# Altium PCB 自己修改盲文板.PcbDoc (part 2 of 4)
Units mm, origin at the board's own origin, x right, y up, seen from the top; angles counter-clockwise.
Board outline 152.4 x 101.6 mm, 4 copper layers (Top Layer, VCC, GND, Bottom Layer); 193 components, 524 nets, 1381 pads, 518 vias.
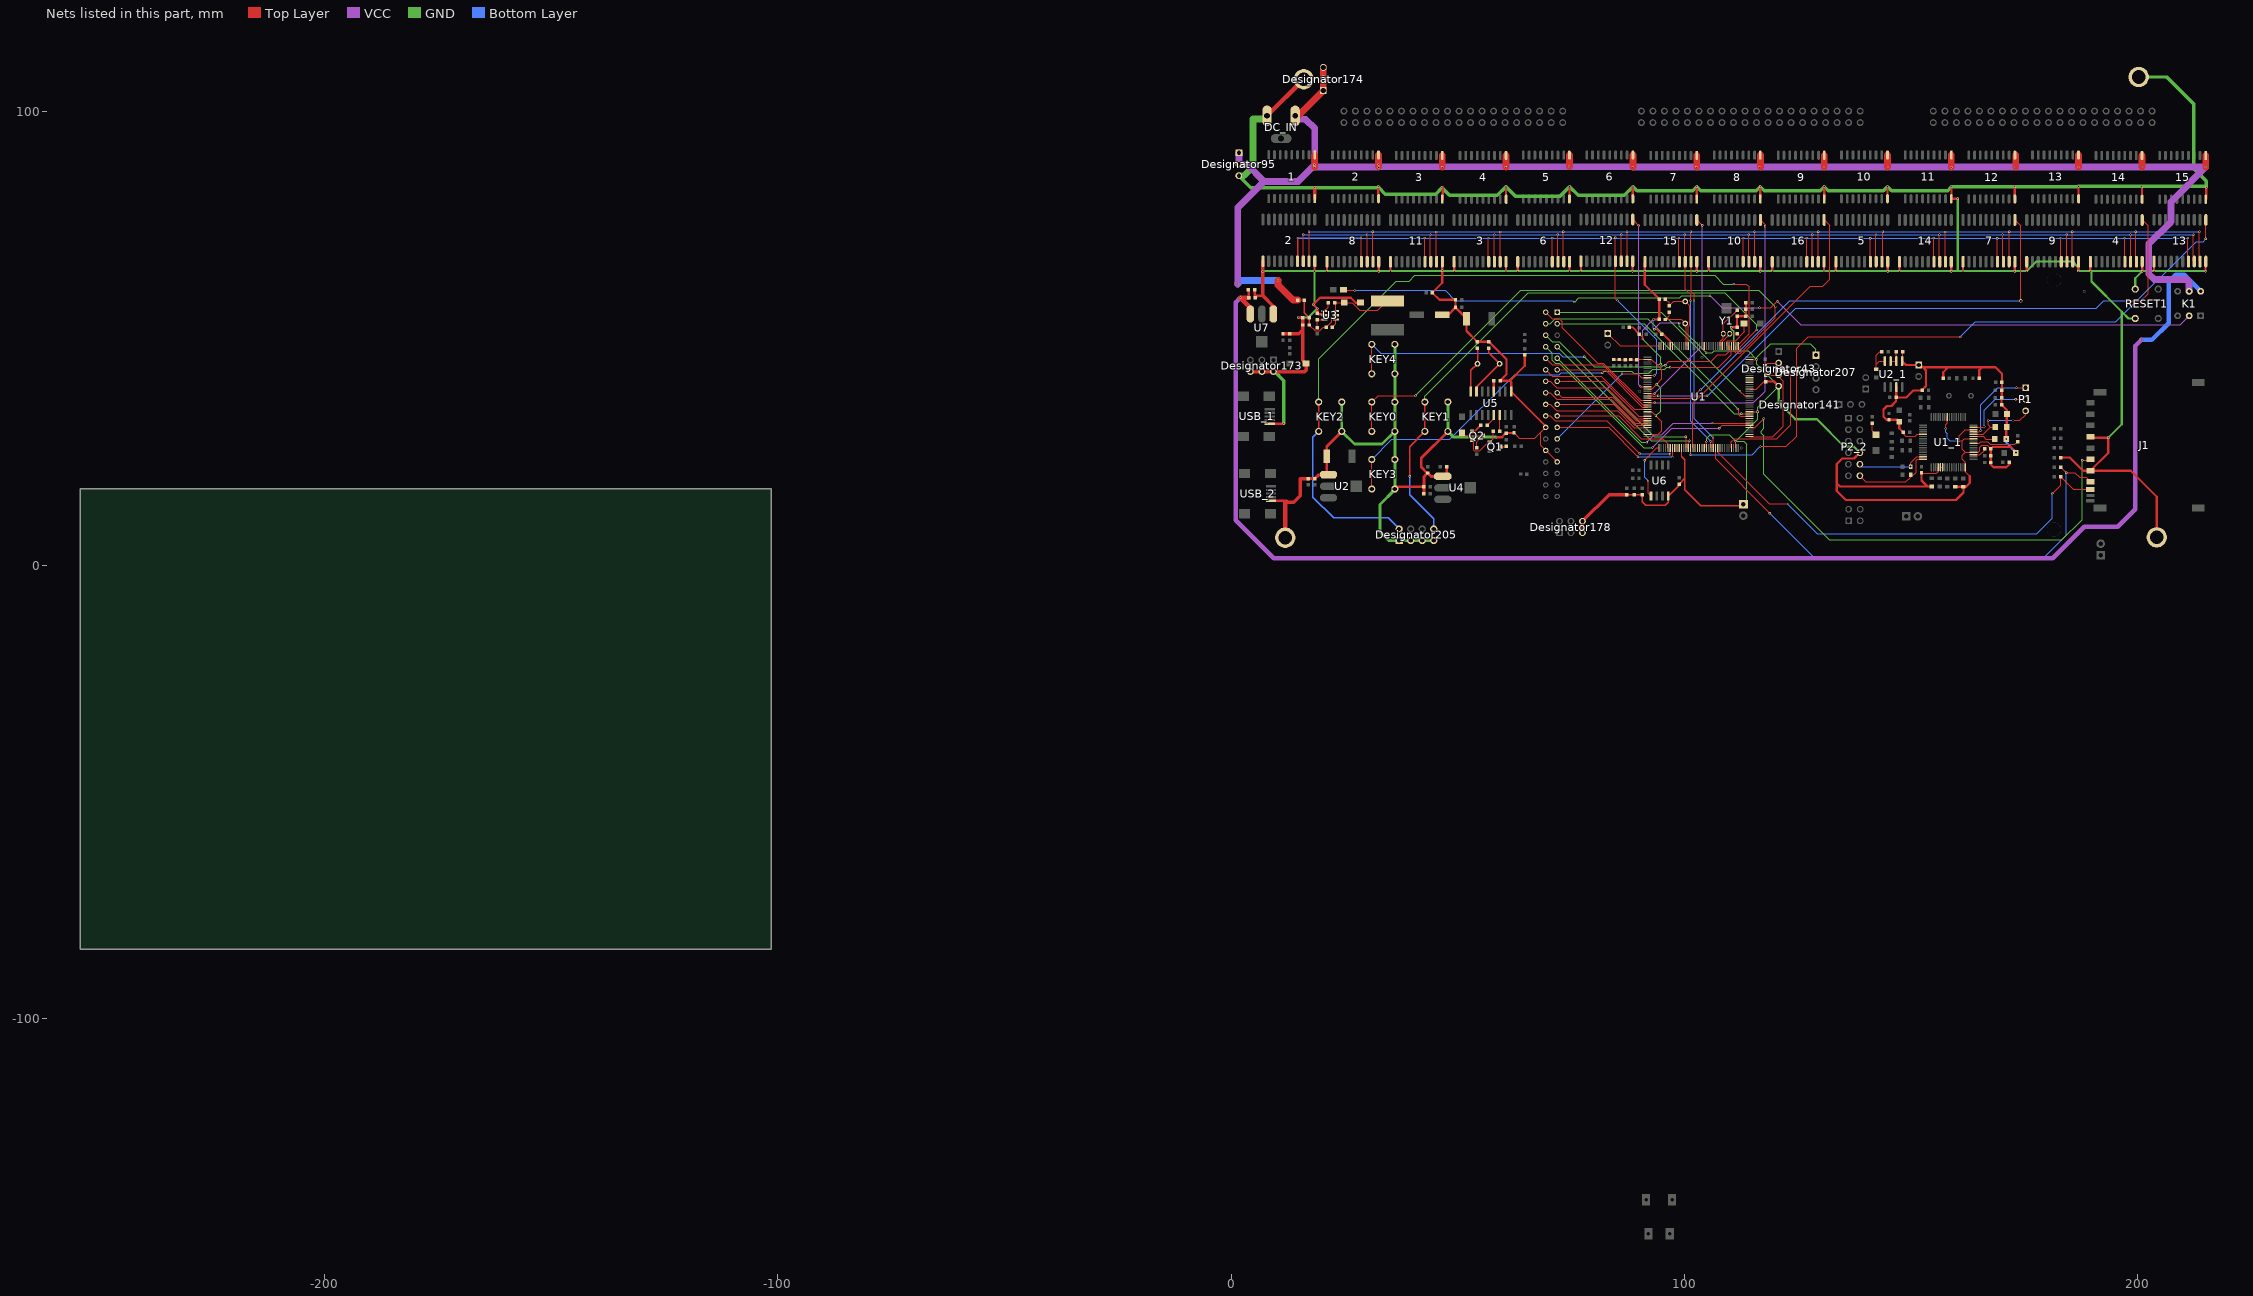
[diagram p4: the nets of this part, all layers, seen from the top]

## Via types
v1: diameter 0.5, hole 0.3, Top Layer to Bottom Layer, 463 vias
v2: diameter 0.5, hole 0.4, Top Layer to Bottom Layer, 48 vias
v3: diameter 1.27, hole 1.016, Top Layer to Bottom Layer, 2 vias
v4: diameter 1, hole 1, Top Layer to Bottom Layer, 2 vias
v5: diameter 3, hole 3, Top Layer to Bottom Layer, tented both sides, 2 vias
v6: diameter 0.8, hole 0.5, Top Layer to Bottom Layer, 1 vias

## Nets (pads, with @x,y where several pads share a name; then routed paths per layer and width w, separated by ;. In a path a pad name is that pad's centre, name@x,y a point inside that pad or via, vN(x,y) a via of type N, cw(c..) or ccw(c..) an arc to the next point about the centre after c; other vN are vias at no path point) (continued)
D6: 2.7@14.63,67.003 3.7@56.794,66.901 4.7@197.111,66.901 5.7@140.984,66.901 6.7@70.826,66.901 7.7@169.047,66.901 8.7@28.73,66.901 9.7@183.079,66.901 10.7@112.921,66.901 11.7@42.762,66.901 12.7@84.76,67.003 13.7@211.15,66.926 14.7@155.016,66.901 15.7@98.889,66.901 16.7 U1.45 | length 304.8
  Top Layer w0.2: 8.7@28.654,66.901 v1@28.654,72.187 ; 11.7@42.672,66.991 v1(42.672,72.111) ; 3.7@56.744,66.951 v1(56.744,72.111) ; 6.7@70.79,66.937 v1(70.79,72.111) ; 12.7@84.684,67.079 v1(84.684,72.161) ; 12.7@84.76,67.003 84.76,58.776 85.192,58.344 v1(85.192,58.318) ; U1.45@91.823,41.812 v1@93.266,41.812 ; 15.7@98.755,67.035 v1(98.755,72.111) ; 10.7@112.921,66.901 112.979,66.959 v1(112.979,72.111) ; v1(126.949,72.111) 126.949,66.904 16.7@126.952,66.901 ; v1(140.97,72.085) 140.97,66.915 5.7@140.984,66.901 ; v1(154.965,72.136) 154.965,66.951 14.7@155.016,66.901 ; v1(168.935,72.085) 168.935,67.013 7.7@169.047,66.901 ; v1(182.931,72.136) 182.931,67.049 9.7@183.079,66.901 ; v1(197.028,72.111) 197.028,66.984 4.7@197.111,66.901 ; 13.7@211.023,67.053 v1(211.023,72.111)
  Top Layer w0.3: 2.7@14.63,67.003 v1@14.63,72.085
  Bottom Layer w0.2: v1@28.626,72.111 v1(42.672,72.111) v1(56.744,72.111) v1(70.79,72.111) 84.633,72.111 v1(84.684,72.161) ; v1@84.684,72.111 v1(98.755,72.111) v1(112.979,72.111) v1(126.949,72.111) 140.945,72.111 v1(140.97,72.085) ; v1(85.192,58.318) 85.192,58.344 93.819,49.717 93.819,42.308 v1(93.294,41.783) ; v1@140.97,72.111 v1(197.028,72.111) v1(211.023,72.111)
  Bottom Layer w0.3: v1(14.605,72.111) v1@28.55,72.111
  other v1: 28.626,72.187
D7: 2.8@15.9,67.003 3.8@58.064,66.901 4.8@198.381,66.901 5.8@142.254,66.901 6.8@72.096,66.901 7.8@170.317,66.901 8.8@30,66.901 9.8@184.349,66.901 10.8@114.191,66.901 11.8@44.032,66.901 12.8@86.03,67.003 13.8@212.42,66.926 14.8@156.286,66.901 15.8@100.159,66.901 16.8 U1.96 | length 328.7
  Top Layer w0.2: 2.8@15.9,67.003 v1(15.9,72.873) ; 8.8@30,66.901 v1@30,72.844 ; 11.8@43.942,66.991 v1(43.942,72.873) ; 3.8@58.064,66.901 v1(58.064,72.873) ; 6.8@72.034,66.962 v1(72.034,72.873) ; 12.8@86.004,67.028 v1(86.004,72.873) ; 15.8@100.051,67.009 v1(100.051,72.873) ; 15.8@100.159,66.901 100.159,60.852 101.321,59.69 v1(101.321,58.268) ; v1(105.791,27.254) 105.791,25.844 U1.96@105.823,25.812 ; v1(114.148,72.873) 114.148,66.944 10.8@114.191,66.901 ; v1(128.168,72.873) 128.168,66.955 16.8@128.222,66.901 ; v1(142.215,72.873) 142.215,66.94 5.8@142.254,66.901 ; v1(156.21,72.847) 156.21,66.976 14.8@156.286,66.901 ; v1(170.129,72.873) 170.129,67.089 7.8@170.317,66.901 ; v1(184.277,72.873) 184.277,66.973 9.8@184.349,66.901 ; 4.8@198.381,66.901 v1@198.381,72.815 ; 13.8@212.217,67.13 v1(212.217,72.847)
  Bottom Layer w0.2: v1(15.9,72.873) v1(29.972,72.873) ; v1@29.972,72.847 v1(156.21,72.847) 170.104,72.847 v1(170.129,72.873) ; v1(101.321,58.268) 101.321,31.725 v1(105.791,27.254) ; v1@170.129,72.847 v1(198.349,72.847) v1(212.217,72.847) v1@212.242,72.847
D8: 2.9@17.17,67.003 3.9@59.334,66.901 4.9@199.651,66.901 5.9@143.524,66.901 6.9@73.366,66.901 7.9@171.587,66.901 8.9@31.27,66.901 9.9@185.619,66.901 10.9@115.461,66.901 11.9@45.302,66.901 12.9@87.3,67.003 13.9@213.69,66.926 14.9@157.556,66.901 15.9@101.429,66.901 16.9 U1.97 | length 338
  Top Layer w0.2: 2.9@17.17,67.003 v1(17.17,73.482) ; 8.9@31.27,66.901 v1@31.27,73.454 ; 11.9@45.237,66.966 v1(45.237,73.457) ; 3.9@59.334,66.901 v1(59.334,73.457) ; 6.9@73.254,67.013 v1(73.254,73.482) ; 12.9@87.3,67.003 v1(87.3,73.482) ; v1(101.397,73.482) 101.397,66.933 15.9@101.429,66.901 101.429,60.318 102.083,59.665 v1(102.083,58.318) ; v1(106.274,28.118) 106.341,28.05 106.341,25.83 U1.97@106.323,25.812 ; v1(115.443,73.482) 115.443,66.918 10.9@115.461,66.901 ; v1(129.464,73.482) 129.464,66.929 16.9@129.492,66.901 ; 5.9@143.524,66.901 143.739,67.115 v1(143.739,73.482) ; v1(157.505,73.431) 157.505,66.951 14.9@157.556,66.901 ; 7.9@171.587,66.901 171.602,66.916 v1(171.602,73.482) ; v1(185.471,73.482) 185.471,67.049 9.9@185.619,66.901 ; v1(199.492,73.482) 199.492,67.06 4.9@199.651,66.901 ; v1(213.563,73.508) 213.563,67.053 13.9@213.69,66.926
  Bottom Layer w0.2: v1(17.17,73.482) v1(31.242,73.482) v1@45.212,73.482 ; v1@45.237,73.482 v1(73.254,73.482) v1(87.3,73.482) v1(101.397,73.482) v1(115.443,73.482) v1(129.464,73.482) v1(143.739,73.482) v1(171.602,73.482) v1(185.471,73.482) v1(199.492,73.482) 213.538,73.482 v1(213.563,73.508) ; v1(102.083,58.318) 102.083,32.309 v1(106.274,28.118)
DIN1-3: C48.1 C49.1 K1.6 U7.3 | length 327.7
  Top Layer w0.5: C49.1@3.802,60.706 3.886,60.622 C48.1@3.886,58.928
  Top Layer w1: C48.1@3.886,58.928 v1(2.032,58.928) 4.233,56.727 U7.3@4.233,55.374
  VCC w1: v1(2.032,58.928) 1.016,57.912 1.016,9.906 9.398,1.524 181.204,1.524 188.112,8.433 195.504,8.433 199.365,12.294 199.365,48.311 v1(200.685,49.632)
  Bottom Layer w1: v1(200.685,49.632) 203.048,49.632 206.756,53.34 206.756,62.484 208.28,64.008 210.175,64.008 K1.6@213.817,60.366
"F CS": U1.73 U6.1 | length 12.8
  Top Layer w0.2: v1(91.186,23.114) 93.884,25.812 U1.73@94.323,25.812 ; v1(91.948,18.542) 91.948,15.824 U6.1@92.583,15.189
  Bottom Layer w0.2: v1(91.186,23.114) 91.186,19.304 v1(91.948,18.542)
"FIFO OE": 
"FIFO RCLK": U1.134
"FIFO RRST": 
"FIFO WEN": U1.133
"FIFO WRST": 
"FSMC A6": 12.11@88.57,76.203 U1.50 | length 39.1
  Top Layer w0.254: 12.11@88.57,76.203 v1(89.916,74.856) ; v1(90.297,39.345) 90.33,39.312 U1.50@91.823,39.312
  VCC w0.254: v1(89.916,74.856) 89.916,39.726 v1(90.297,39.345)
"FSMC A7": 15.11@102.699,76.101 U1.53 | length 44.7
  Top Layer w0.2: U1.53@91.823,37.812 93.329,37.812 v1(93.345,37.795)
  Top Layer w0.254: 15.11@102.699,76.101 102.699,76.092 v1(103.886,74.905)
  VCC w0.254: v1(93.345,37.795) 103.886,48.336 v1@103.886,74.93
"FSMC A8": 4.11@200.921,76.101 U1.54 | length 136.6
  Top Layer w0.2: U1.54@91.823,37.312 91.849,37.338 93.024,37.338 93.117,37.245 93.573,37.245 93.666,37.338 v1(94.158,37.338) ; v1(197.358,58.318) 200.66,58.318 202.209,59.868 202.209,74.812 4.11@200.921,76.101
  VCC w0.254: v1(94.158,37.338) 94.201,37.382 104.884,37.382 v1(104.953,37.313)
  Bottom Layer w0.254: v1(104.953,37.313) 105.159,37.313 124.463,56.617 190.779,56.617 192.481,58.318 v1(197.358,58.318)
"FSMC A9": 7.11@172.857,76.101 U1.55 | length 109.6
  Top Layer w0.2: U1.55@91.823,36.812 93.338,36.812 93.362,36.788 101.66,36.788 v1(103.505,38.633) ; 7.11@172.857,76.101 174.126,74.832 v6(174.126,58.251)
  Bottom Layer w0.2: v1@103.48,38.557 123.173,58.251 v6(174.126,58.251)
"FSMC A10": Designator141.2 U1.56 | length 31.3
  Top Layer w0.2: Designator141.2@69.367,55.753 70.82,54.3 72.358,54.3 72.995,53.663 72.995,52.373 80.827,44.54 82.098,44.54 90.327,36.312 U1.56@91.823,36.312
"FSMC A11": 10.11@116.731,76.101 U1.57 | length 65.2
  Top Layer w0.2: U1.57@91.823,35.812 v1@93.368,35.812
  Top Layer w0.254: 10.11@116.731,76.101 117.754,75.077 v1(117.754,74.727)
  VCC w0.254: v1(93.421,35.865) 93.541,35.745 115.163,35.745 117.754,38.336 v1(117.754,74.727)
"FSMC A12": 13.11@214.96,76.126 U1.87 | length 150.3
  Top Layer w0.2: v1@101.323,24.335 U1.87@101.323,25.812 ; v1(116.725,26.142) 122.408,26.142 124.714,28.448 124.714,47.752 127.254,50.292 v1(160.782,50.292) ; v1(214.96,71.933) 13.11@214.96,76.126
  Bottom Layer w0.2: v1(101.321,24.333) 114.917,24.333 v1(116.725,26.142) ; v1(160.782,50.292) 164.109,53.619 195.097,53.619 212.801,71.323 214.351,71.323 v1(214.96,71.933)
"FSMC A13": 16.11 U1.88 | length 64.9
  Top Layer w0.254: U1.88@101.823,25.812 101.823,35.613 127.678,61.468 130.477,61.468 131.978,62.97 131.978,74.885 16.11@130.762,76.101
"FSMC A14": U1.89
"FSMC A15": U1.90
"FSMC A16": U1.80
"FSMC A17": U1.81
"FSMC A18": U1.82
"FSMC D0": Designator141.6 U1.85 | length 42.7
  Top Layer w0.254: v1(100.279,28.27) 100.33,28.219 U1.85@100.33,25.819
  GND w0.254: Designator141.6@69.367,50.673 70.793,49.247 72.369,49.247 93.346,28.27 v1(100.279,28.27)
"FSMC D1": Designator141.7 U1.86 | length 39.5
  Top Layer w0.254: U1.86@100.823,25.812 100.823,26.801 101.067,27.045 v1(101.067,27.432)
  GND w0.254: Designator141.7@71.907,48.133 92.608,27.432 v1(101.067,27.432)
"FSMC D2": Designator141.8 U1.114 | length 57.1
  Top Layer w0.2: v1(107.62,30.15) 108.282,30.812 U1.114@114.323,30.812
  VCC w0.254: v1(92.913,25.908) 97.155,30.15 v1(107.62,30.15)
  GND w0.254: Designator141.8@69.367,48.133 70.793,46.707 70.793,45.131 71.446,44.479 72.38,44.479 90.95,25.908 v1(92.913,25.908)
"FSMC D3": Designator141.9 U1.115 | length 51.8
  Top Layer w0.2: v1(106.179,31.312) U1.115@114.323,31.312
  VCC w0.254: v1(91.694,27.102) 93.327,28.735 94.963,28.735 97.54,31.312 v1(106.179,31.312)
  GND w0.254: Designator141.9@71.907,45.593 90.399,27.102 v1(91.694,27.102)
"FSMC D4": Designator141.10 U1.58 | length 26.7
  Top Layer w0.2: Designator141.10@69.367,45.593 70.82,44.14 81.933,44.14 90.762,35.312 U1.58@91.823,35.312
"FSMC D5": Designator141.11 U1.59 | length 23.3
  Top Layer w0.2: Designator141.11@71.907,43.053 82.454,43.053 90.696,34.812 U1.59@91.823,34.812
"FSMC D6": Designator141.12 U1.60 | length 26.1
  Top Layer w0.2: Designator141.12@69.367,43.053 70.82,41.6 81.596,41.6 88.885,34.312 U1.60@91.823,34.312
"FSMC D7": Designator141.13 U1.63 | length 23.1
  Top Layer w0.2: Designator141.13@71.907,40.513 82.118,40.513 89.847,32.785 91.796,32.785 U1.63@91.823,32.812
"FSMC D8": Designator141.14 U1.64 | length 25.9
  Top Layer w0.2: Designator141.14@69.367,40.513 70.37,40.513 71.822,39.06 82.86,39.06 89.608,32.312 U1.64@91.823,32.312
"FSMC D9": Designator141.15 U1.65 | length 22.5
  Top Layer w0.2: Designator141.15@71.907,37.973 72.873,37.008 84.125,37.008 89.321,31.812 U1.65@91.823,31.812
"FSMC D10": Designator141.16 U1.66 | length 25.2
  Top Layer w0.2: Designator141.16@69.367,37.973 70.37,37.973 71.822,36.52 83.857,36.52 89.066,31.312 U1.66@91.823,31.312
"FSMC D11": Designator141.17 U1.67 | length 21.8
  Top Layer w0.2: Designator141.17@71.907,35.433 84.379,35.433 89,30.812 U1.67@91.823,30.812
"FSMC D12": Designator141.18 U1.68 | length 24.6
  Top Layer w0.2: Designator141.18@69.367,35.433 70.37,35.433 71.822,33.98 85.266,33.98 88.934,30.312 U1.68@91.823,30.312
"FSMC D13": Designator141.19 U1.77 | length 27.9
  Top Layer w0.2: Designator141.19@71.907,32.893 85.471,32.893 90.479,27.885 95.201,27.885 96.323,26.763 U1.77@96.323,25.812
"FSMC D14": Designator141.20 U1.78 | length 32.4
  Top Layer w0.2: Designator141.20@69.367,32.893 70.37,32.893 71.457,31.806 82.875,31.806 v1(90.106,24.575) ; v1(96.799,24.409) 96.823,24.433 U1.78@96.823,25.812
  Bottom Layer w0.2: v1(90.106,24.575) 96.634,24.575 v1(96.799,24.409)
"FSMC D15": Designator141.21 U1.79 | length 30.2
  Top Layer w0.2: Designator141.21@71.907,30.353 83.261,30.353 v1(89.713,23.901) ; U1.79@97.323,25.812 97.349,25.785 97.349,23.816 v1(97.333,23.8)
  Bottom Layer w0.2: v1(89.713,23.901) 89.755,23.859 97.273,23.859 v1(97.333,23.8)
"FSMC NE3": 
"FSMC NE4": Designator141.1 U1.127 | length 50.1
  Top Layer w0.254: v1(112.217,38.354) 113.26,37.312 U1.127@114.323,37.312
  GND w0.254: Designator141.1@71.907,55.753 94.818,55.753 v1(112.217,38.354)
"FSMC NOE": Designator141.4 U1.118 | length 55
  Top Layer w0.254: v1(111.709,34.417) 111.894,34.232 111.894,33.111 112.232,32.773 114.284,32.773 U1.118@114.323,32.812
  GND w0.254: Designator141.4@69.367,53.213 70.331,53.213 71.446,54.327 91.824,54.327 111.709,34.442 v1(111.709,34.417)
"FSMC NWE": Designator141.3 U1.119 | length 50.6
  Top Layer w0.254: v1(112.471,33.35) 114.284,33.35 U1.119@114.323,33.312
  GND w0.254: Designator141.3@71.907,53.213 91.11,53.213 99.042,45.281 99.042,45.227 99.38,44.889 99.434,44.889 110.973,33.35 v1@112.42,33.35
GBUF: 
GND: 1.9 2.1@7.01,67.003 2.9@32.512,80.797 2.10@18.44,67.003 3.1@49.174,66.901 3.9@46.558,80.696 3.10@60.604,66.901 4.1@189.491,66.901 4.9@60.63,80.67 4.10@200.921,66.901 5.1@133.364,66.901 5.9@74.6,80.747 5.10@144.794,66.901 6.1@63.206,66.901 6.9@88.595,80.772 6.10@74.636,66.901 7.1@161.427,66.901 7.9@102.692,80.696 7.10@172.857,66.901 8.1@21.11,66.901 8.9@116.713,80.747 8.10@32.54,66.901 9.1@175.459,66.901 9.9@130.81,80.721 9.10@186.889,66.901 10.1@105.301,66.901 10.9@144.755,80.772 10.10@116.731,66.901 11.1@35.142,66.901 11.9@158.826,80.772 11.10@46.572,66.901 12.1@77.14,67.003 12.9@172.847,80.747 12.10@88.57,67.003 13.1@203.53,66.926 13.9@186.893,80.772 13.10@214.96,66.926 14.1@147.396,66.901 14.9@200.889,80.67 14.10@158.826,66.901 15.1@91.269,66.901 15.9@214.935,80.67 15.10@102.699,66.901 16.1 16.10 C1.1 C2.1 C2_1.1 C3.1 C3_1.1 C4.1 C4_1.2 C5.1 C6.1 C6_1.2 C7.1 C7_1.1 C8.1 C8_1.2 C9.1 C9_1.1 C10.1 C10_1.1 C11.2 C12.2 C13.2 C13_1.2 C14.2 C14_1.2 C15.2 C15_1.1 C16.2 C16_1.2 C17.2 C17_1.2 C18.2 C19.2 C19_1.2 C20.2 C20_1.2 C21.2 C21_1.1 C26.1 C27.1 C28.2 C29.1 C30.1 C31.1 C32.2 C32_1.2 C34.1 C34_1.2 C35.1 C36.1 C37.1 C38.1 C39.1 C40.1 C41.2 C42.1 C43.2 C44.1 C45.1 C47.2 C48.2 C49.2 C50.2 D3.1 D4.2 D5.1 D6.1 DC_IN.2 Designator43.4 Designator95.3 Designator141.22 Designator141.26 Designator141.27 Designator173.2 Designator173.4 Designator173.6 Designator178.5 Designator178.6 Designator205.1 Designator205.2 Designator205.3 Designator205.4 Designator207.1 J1.3 J1.6 KEY0.1 KEY1.1 KEY2.1 KEY3.1 KEY4.1 P2_2.10 P3_1.1 P3_2.1 pad.1 pad.69 pad.72 R1_1.1 R5.1 R10_1.1 R12.1 R14.2 R23_1.1 RESET1.2 U1.16 U1.30 U1.31 U1.38 U1.51 U1.61 U1.71 U1.83 U1.94 U1.107 U1.120 U1.130 U1.143 U1_1.4 U1_1.10 U1_1.14 U1_1.25 U1_1.37 U1_1.52 U1_1.64 U2.1 U2_1.1 U2_1.7 U3.2 U4.1 U5.1 U6.4 U7.1 USB_1.5 USB_2.5 | length 1530.7
  Top Layer w0.2: C43.2@62.381,29.121 63.562,27.94 66.946,27.94 Designator141.22@69.361,30.355 ; Designator141.22@69.367,30.353 68.28,29.266 68.28,26.36 69.363,25.277 Designator141.27@71.907,22.733 ; C18.2@84.33,45.326 84.355,45.301 C21.2@86.895,45.301 C20.2@89.41,45.301 ; C20.2@89.41,45.352 U1.38@91.783,45.352 ; U1.71@91.823,28.812 93.22,28.812 93.27,28.762 94.106,28.762 94.936,29.592 94.936,31.649 92.774,33.812 U1.61@91.823,33.812 ; U1.51@91.823,38.812 92.774,38.812 v1(93.844,39.882) 94.996,41.033 94.996,43.09 93.844,44.242 ; U1.38@91.823,45.313 92.772,45.313 93.844,44.242 ; v1@94.686,44.242 93.844,44.242 ; U1.31@96.823,48.312 U1.30@97.323,48.312
  Top Layer w0.254: U1.83@99.323,25.812 99.323,23.917 99.346,23.894 ; U1.16@104.323,48.312 104.323,47.214 v1(104.724,46.812) ; U1.94@104.823,25.812 v1(104.823,27.229) ; v1(111.252,27.305) 111.323,27.234 U1.107@111.323,25.812 ; U1.120@114.323,33.812 pad.69@116.074,33.812 ; U1.130@114.323,38.812 115.774,38.812 117.424,40.462 R12.1@117.856,40.462 ; U1.143@114.323,45.312 v1@115.924,45.312 ; U2_1.1@147.98,44.958 148.095,45.072 C32_1.2@148.095,47.014 ; C3_1.1@148.234,29.261 148.234,28.931 148.768,28.397 150.825,28.397 151.28,28.852 U1_1.37@152.616,28.852 ; C1.1@152.248,20.32 152.375,20.193 155.55,20.193 155.916,20.559 U1_1.52@155.916,21.552 ; v2(157.582,30.099) 157.582,30.912 157.916,31.246 U1_1.25@157.916,32.652 ; 162.916,19.583 161.916,20.583 U1_1.64@161.916,21.552 161.916,22.666 161.265,23.317 161.265,24.202 161.914,24.852 ; U1_1.10@163.716,27.852 161.684,27.852 161.265,27.432 ; U1_1.14@163.716,29.852 161.906,29.852 160.528,28.473 v2(160.528,27.407) 161.239,27.407 161.265,27.432 ; R1_1.1@167.538,25.654 166.772,26.42 165.51,26.42 165.075,25.984 165.075,25.187 164.74,24.852 U1_1.4@163.716,24.852 161.914,24.852 ; 161.265,27.432 161.265,25.502 161.914,24.852
  Top Layer w0.3: C16.2@87.247,15.532 C15.2@88.898,15.532 C17.2@90.676,15.532 90.676,13.972 91.44,13.208 95.758,13.208 96.395,13.845 U6.4@96.395,15.189 98.804,17.599 C41.2@98.804,17.843 100.076,19.115 ; C44.1@87.808,52.4 88.544,52.4 C10.1@90.043,50.902 90.729,50.216 v1(90.729,49.835) ; v1(93.294,52.019) 93.853,52.019 C9.1@94.996,50.876 95.322,50.876 96.8,49.398 U1.31@96.8,48.335 ; 99.346,23.894 100.076,23.164 100.076,19.115 ; P3_1.1@112.979,13.411 112.674,13.106 103.556,13.106 100.076,16.586 100.076,19.115
  Top Layer w0.4: R1_1.1@167.538,25.654 167.923,26.039 171.979,26.039 C6_1.2@173.101,24.917
  Top Layer w0.5: USB_1.5@8.528,31.166 11.524,31.166 v1(11.6,31.242) ; USB_2.5@8.782,14.148 12.268,14.148 ; v1@14.859,54.508 C31.1@15.799,54.508 ; v1(18.364,64.821) 2.10@18.364,66.926 ; v1(18.999,56.591) v1(18.11,57.48) 19.591,58.961 26.352,58.961 27.452,57.861 D3.1@28.499,57.861 ; v1@19.001,56.59 R14.2@19.001,55.512 19.184,55.328 20.328,55.328 U3.2@20.574,55.082 ; v1@21.11,64.849 8.1@21.11,66.901 ; v1(32.41,83.388) 32.41,81.001 2.9@32.563,80.848 ; v1(32.563,64.77) 8.10@32.563,66.878 ; v1@35.142,64.835 11.1@35.142,66.901 ; v1(46.507,83.185) 46.66,83.287 3.9@46.66,80.594 ; 11.10@46.558,66.887 v1(46.558,64.872) 46.558,62.255 C29.1@44.374,60.071 45.949,58.496 C2.1@49.479,58.496 C27.1@49.479,56.845 C27.1@49.479,56.769 ; C28.2@46.564,55.194 47.904,55.194 C27.1@49.479,56.769 ; U4.1@46.684,19.558 47.523,20.398 C35.1@47.523,21.667 ; v1(49.174,64.821) 3.1@49.174,66.901 ; v1(60.604,64.821) 3.10@60.604,66.901 ; 4.9@60.604,80.696 v1(60.604,83.464) ; C32.2@60.679,29.096 62.355,29.096 C43.2@62.381,29.121 ; v1(63.195,64.821) 63.206,64.831 6.1@63.206,66.901 ; C6.1@64.77,46.33 64.77,43.967 61.468,40.665 ; Designator141.26@69.03,25.277 Designator141.26@69.363,25.277 ; Designator141.22@69.367,30.353 69.367,30.616 U5.1@61.747,38.236 61.747,40.386 61.468,40.665 ; 5.9@74.6,80.747 v1@74.6,83.439 ; v1(74.625,64.821) 6.10@74.625,66.89 ; v1@77.14,64.846 12.1@77.14,67.003 ; v1(88.494,64.795) 12.10@88.494,66.926 ; 6.9@88.595,80.772 v1@88.595,83.439 ; 15.1@91.237,66.548 v1(91.237,64.821) 91.237,61.805 C8.1@94.393,58.649 C7.1@94.393,54.16 ; pad.72@93.142,54.153 C7.1@94.386,54.153 ; v1(102.692,64.795) 15.10@102.692,66.894 ; 7.9@102.692,80.696 v1(102.692,83.439) ; v1@105.301,64.838 10.1@105.301,66.901 ; v1(110.312,52.426) C3.1@111.582,52.426 C4.1@111.582,54.839 113.524,54.839 C14.2@113.524,57.836 ; 8.9@116.662,81.102 v1(116.662,83.439) ; v1(116.713,64.795) 10.10@116.713,66.883 ; R12.1@117.856,40.462 119.736,40.462 Designator43.4@120.752,39.446 ; v1@119.332,64.849 16.1@119.332,66.901 ; v1(130.734,64.821) 16.10@130.734,66.872 ; 9.9@130.81,80.721 v1(130.81,83.49) ; v1@133.364,64.86 5.1@133.364,66.901 ; P2_2.10@138.659,24.765 137.389,23.495 134.798,23.495 133.579,22.276 133.579,18.059 ; 10.9@144.755,80.772 v1(144.755,83.439) ; v1(144.831,64.77) 5.10@144.831,66.864 ; U2_1.7@146.71,39.258 146.71,37.019 C34_1.2@146.647,36.955 ; v1@147.396,64.846 14.1@147.396,66.901 ; U2_1.1@147.98,44.958 148.819,44.12 P3_2.1@151.638,44.12 152.07,44.12 152.578,43.612 ; C3_1.1@148.234,29.261 147.345,30.15 C4_1.2@147.345,31.572 146.888,32.029 C5.1@145.085,32.029 144.526,32.029 143.866,32.69 143.866,34.29 144.653,35.077 145.618,35.077 146.647,36.106 C34_1.2@146.647,36.955 ; C1.1@152.248,20.32 152.248,18.618 153.558,17.308 ; R10_1.1@154.524,17.308 153.558,17.308 ; C21_1.1@157.023,41.148 157.023,42.52 158.115,43.612 ; v1(158.801,64.795) 14.10@158.801,66.876 ; 11.9@158.826,80.772 v1@160.223,80.772 ; 11.9@158.852,80.797 v1(158.852,83.388) ; R5.1@159.731,17.283 R23_1.1@161.509,17.283 ; v1@161.427,64.857 7.1@161.427,66.901 ; 162.916,19.583 162.916,18.11 162.088,17.283 R23_1.1@161.509,17.283 ; C15_1.1@164.998,41.148 164.998,42.977 165.633,43.612 ; R1_1.1@167.538,25.654 C10_1.1@167.538,24.13 C2_1.1@167.538,22.606 167.538,22.149 168.148,21.539 170.967,21.539 171.602,22.174 C7_1.1@171.602,22.682 ; v2(170.942,27.788) 170.942,30.302 C13_1.2@171.069,30.429 171.069,33.249 C8_1.2@171.12,33.299 171.12,34.112 C9_1.1@169.901,35.331 169.901,36.892 C17_1.2@169.939,36.93 C16_1.2@169.939,38.556 169.99,38.606 C19_1.2@169.99,40.283 169.99,42.202 168.58,43.612 165.633,43.612 ; v1(172.822,64.77) 7.10@172.822,66.865 ; 12.9@172.822,80.772 v1(172.822,83.439) ; v2(173.101,24.841) C6_1.2@173.101,24.917 ; v1@175.459,64.842 9.1@175.459,66.901 ; C42.1@182.931,23.693 184.944,23.693 187.846,20.791 J1.6@189.493,20.791 ; v1(186.842,64.821) 9.10@186.842,66.854 ; 13.9@186.868,80.797 v1(186.868,83.49) ; v1@189.491,64.827 4.1@189.491,66.901 ; J1.3@189.493,28.291 189.743,28.042 v1(193.421,28.042) 193.421,24.719 J1.6@189.493,20.791 ; 14.9@200.863,80.696 v1(200.863,83.388) ; v1(200.914,64.77) 4.10@200.914,66.894 ; 13.1@203.53,66.926 203.53,64.846 v1(203.556,64.821) ; pad.1@204.132,6.096 204.132,15.07 198.411,20.791 J1.6@189.493,20.791 ; v1(214.909,64.77) 13.10@214.909,66.876 ; 15.9@215.036,80.772 v1(215.036,83.337) ; C27.1@49.479,56.769 D5.1@51.892,54.356 51.892,51.613 C39.1@54.28,49.225 C38.1@56.845,49.225 56.858,49.225 60.706,45.377 60.706,42.062 C37.1@59.309,40.665 61.468,40.665 ; 133.579,18.059 134.33,17.308 153.558,17.308 ; 133.579,18.059 133.579,16.307 135.56,14.326 159.842,14.326 161.509,15.992 R23_1.1@161.509,17.283 ; C34_1.2@146.647,36.955 148.893,36.955 150.446,38.508 C20_1.2@152.413,38.508 152.413,38.646 153.264,39.497 153.264,42.926 152.578,43.612 ; 152.578,43.612 158.115,43.612 ; 158.115,43.612 165.633,43.612
  Top Layer w0.508: v1(58.42,28.194) 59.69,28.194 ; 59.777,28.194 59.69,28.194 ; C32.2@60.592,29.096 59.69,28.194
  Top Layer w0.635: C49.2@5.187,60.704 5.187,59.01 C48.2@5.271,58.926 5.733,59.389 7.01,59.389 ; C45.1@17.043,19.051 C26.1@18.44,19.051 19.303,19.914 U2.1@21.461,19.914 21.082,20.293 D6.1@21.082,23.953 21.082,26.162 KEY2.1@24.384,29.464 ; KEY3.1@36.093,16.764 36.601,17.272 C40.1@42.494,17.272 ; C34.1@42.494,15.748 C40.1@42.494,17.272 ; U4.1@46.684,19.558 44.07,19.558 C36.1@43.332,20.295 ; KEY1.1@47.803,29.464 41.91,23.571 41.91,21.61 43.224,20.295 C36.1@43.332,20.295 ; C40.1@42.494,17.272 42.494,19.457 C36.1@43.332,20.295
  Top Layer w0.75: 11.934,13.814 13.814,13.814 15.24,15.24 15.24,19.05 ; 15.241,19.051 C45.1@17.043,19.051
  Top Layer w0.762: Designator173.6@4.234,42.672 Designator173.4@6.774,42.672 Designator173.2@9.314,42.672 16.256,42.672 16.51,42.926 D4.2@16.51,44.45 15.799,45.161 15.799,51.867 ; v1(6.934,64.694) 6.934,66.926 2.1@7.01,67.003 ; v1@7.01,64.618 7.01,59.389 9.313,57.086 U7.1@9.313,55.374 ; C50.2@11.432,50.99 C47.2@12.956,50.99 14.922,50.99 15.799,51.867 ; C31.1@15.799,54.508 C30.1@15.799,52.934 15.799,51.867 ; 1.9@18.44,80.823 v1@18.44,83.16 ; Designator178.5@77.47,7.112 Designator178.6@77.47,9.652 83.35,15.532 C16.2@87.247,15.532
  Top Layer w1: DC_IN.2@7.917,99.06 15.984,107.127 pad.1@15.998,107.127 ; pad.1@11.934,6.035 11.934,13.814
  VCC w0.254: v1(90.729,49.835) 90.729,51.74 pad.72@93.142,54.153 ; v1(93.294,52.019) 94.666,53.391 v1(98.831,53.391)
  GND w0.254: v1@90.716,49.847 v1@90.729,49.86 ; v1(90.729,49.835) 94.717,45.847 v1(94.717,44.272) ; v1(93.675,32.893) 94.735,33.953 94.735,38.991 v1(93.844,39.882) ; v1(98.831,53.391) 98.831,52.705 v1(104.724,46.812) 106.143,46.812 106.568,47.237 110.82,47.237 114.002,47.237 v1(115.926,45.314) ; v1@104.696,27.229 104.902,27.435 104.902,27.94 105.664,28.702 109.855,28.702 v1(111.252,27.305) ; P3_1.1@112.979,13.411 113.665,14.097 113.665,26.67 113.03,27.305 v1(111.252,27.305) ; Designator207.1@128.981,46.279 128.981,47.625 127.762,48.844 118.974,48.844 115.926,45.796 v1(115.926,45.314) ; v1(111.252,27.305) 116.103,32.156 pad.69@116.103,33.782 116.103,34.798 Designator43.4@120.752,39.446 115.926,44.272 v1(115.926,45.314)
  GND w0.3: v1(110.312,52.426) 110.312,52.014 110.815,51.511 110.815,47.242 110.82,47.237
  GND w0.5: v1@6.934,64.821 v1(18.364,64.821) ; v1(14.757,54.61) 17.018,54.61 v1(18.999,56.591) ; v1(18.11,57.48) 18.364,57.734 v1(18.364,64.821) ; KEY2.1@24.384,29.464 KEY2.1@24.384,35.964 ; v1@88.468,64.821 v1(77.114,64.821) v1(74.625,64.821) v1(63.195,64.821) v1(60.604,64.821) v1(49.174,64.821) v1(35.128,64.821) v1(21.082,64.821) v1(18.364,64.821) ; v1@88.494,64.821 v1(91.237,64.821) v1(105.283,64.821) v1(119.304,64.821) v1(130.734,64.821) v1(133.325,64.821) v1@144.78,64.821 ; Designator43.4@120.752,39.446 120.752,35.814 124.435,32.131 129.184,32.131 135.23,26.086 137.338,26.086 P2_2.10@138.659,24.765 ; v1@144.831,64.821 v1(147.371,64.821) v1(161.392,64.821) v1@172.771,64.821 ; 160.249,64.897 v1(160.249,80.797) ; v1@172.822,64.821 v1(175.438,64.821) 177.546,66.929 185.547,66.929 186.842,65.634 v1(186.842,64.821) v1(189.484,64.821) ; v1(193.421,28.042) 196.444,31.064 196.444,55.829 ; RESET1.2@199.39,54.356 197.917,54.356 196.444,55.829 ; RESET1.2@199.39,60.856 199.39,63.246 v1(200.914,64.77) ; v1@200.863,64.821 v1(189.484,64.821) ; v1@200.914,64.821 v1(203.556,64.821) v1@214.935,64.821 ; v1(189.484,64.821) 189.763,64.541 189.763,62.509 196.444,55.829
  GND w0.635: KEY2.1@24.384,29.464 27.178,26.67 33.299,26.67 KEY0.1@36.093,29.464 ; KEY4.1@36.093,48.664 KEY4.1@36.093,42.164 KEY0.1@36.093,35.964 KEY0.1@36.093,29.464 ; Designator205.4@44.679,5.41 Designator205.3@42.139,5.41 Designator205.2@39.599,5.41 Designator205.1@37.059,5.41 34.747,5.41 32.817,7.341 32.817,13.335 36.093,16.612 KEY3.1@36.093,16.764 KEY3.1@36.093,23.264 KEY0.1@36.093,29.464 ; KEY1.1@47.803,35.964 KEY1.1@47.803,29.464 49.073,28.194 v1(58.42,28.194)
  GND w0.762: Designator95.3@1.694,85.852 4.361,83.185 v1(18.415,83.185) 32.207,83.185 v1(32.41,83.388) 34.011,81.788 45.11,81.788 v1(46.507,83.185) 48.158,81.534 58.696,81.534 60.604,83.442 62.767,81.28 72.463,81.28 74.625,83.442 76.533,81.534 86.712,81.534 88.621,83.442 89.513,82.55 101.803,82.55 v1(102.692,83.439) 103.581,82.55 115.773,82.55 v1(116.662,83.439) 117.551,82.55 129.918,82.55 130.81,83.442 131.702,82.55 143.866,82.55 v1(144.755,83.439) 145.644,82.55 158.013,82.55 v1(158.852,83.388) 158.902,83.439 v1(172.822,83.439) 186.817,83.439 v1(186.868,83.49) 214.884,83.49 v1(215.036,83.337) 215.036,84.684 212.344,87.376 212.344,101.6 206.309,107.635 pad.1@200.148,107.635 ; v1@6.934,64.676 v1(6.934,64.694) ; DC_IN.2@7.219,98.362 DC_IN.2@7.917,99.06 ; Designator173.2@9.314,42.672 9.568,42.672 11.6,40.64 v1(11.6,31.242)
  GND w1.5: Designator95.3@1.694,85.852 2.794,85.852 4.806,87.864 4.806,98.362 DC_IN.2@7.219,98.362
  Bottom Layer w0.254: pad.72@93.142,54.153 93.142,52.172 v1(93.294,52.019) ; v2(157.582,30.099) 157.582,29.261 157.916,28.927 157.916,27.952 158.461,27.407 v2(160.528,27.407)
  Bottom Layer w0.5: v2(170.942,27.788) 170.942,27 v2(173.101,24.841)
  other v1: 74.625,83.464 88.621,83.464
IIC_SCL: P2_2.11 R17_1.2 U1_1.47 | length 15.5
  Top Layer w0.254: v2(149.857,21.717) 149.857,22.501 151.207,23.852 U1_1.47@152.616,23.852
  Bottom Layer w0.254: P2_2.11@138.659,22.225 139.167,21.717 v2(149.857,21.717)
IIC_SDA: P2_2.12 R18_1.2 U1_1.48 | length 18.5
  Top Layer w0.254: P2_2.12@138.659,19.685 140.005,18.339 148.819,18.339 149.857,19.377 R18_1.2@149.857,19.939 150.571,19.939 151.079,20.447 151.079,23.063 151.368,23.352 U1_1.48@152.616,23.352
IOVDD: 
"IWIRE DQ": 
"JOY CLK": J1.5 U1.113 | length 109.8
  Top Layer w0.254: U1.113@114.323,30.312 115.478,30.312 v1@117.462,32.296 ; v1(187.706,23.114) 189.316,23.114 J1.5@189.493,23.291
  GND w0.254: v1(117.45,32.309) 117.45,30.128 116.873,29.551 116.873,29.073 117.45,28.496 117.45,20.015 131.902,5.563 183.236,5.563 187.706,10.033 v1(187.706,23.114)
"JOY DAT": J1.8 R28.1 U1.99 | length 101.2
  Top Layer w0.254: U1.99@107.323,25.812 107.323,24.822 118.683,13.462 v1(122.682,13.462) ; v1(181.102,15.748) 182.931,17.577 R28.1@182.931,19.456 185.725,16.662 J1.8@189.484,16.662
  Bottom Layer w0.254: v1(122.682,13.462) 129.286,6.858 177.622,6.858 181.102,10.338 v1(181.102,15.748)
"JOY LAT": J1.7 R27.1 U1.98 | length 112.7
  Top Layer w0.2: U1.98@106.823,25.812 106.823,23.384 v1(118.777,11.43) ; R27.1@182.931,21.575 v1(184.186,20.32) 186.098,20.32 187.114,19.304 188.555,19.304 J1.7@189.493,18.366
  Bottom Layer w0.2: v1(118.777,11.43) 128.911,1.295 178.867,1.295 184.186,6.614 v1(184.186,20.32)
JRDO: 
JTCK: Designator43.3 R12.2 U1.109 | length 23.2
  Top Layer w0.2: U1.109@114.323,28.312 119.498,28.312 121.802,30.616 121.802,40.496 120.752,41.546 Designator43.3@120.752,41.986 120.612,41.847 R12.2@117.858,41.847
JTDI: U1.110
JTMS: Designator43.2 R6.2 U1.105 | length 33.9
  Top Layer w0.2: U1.105@110.323,25.812 110.323,27.154 111.054,27.885 120.341,27.885 123.444,30.988 123.444,41.834 Designator43.2@120.752,44.526 118.324,44.526 R6.2@117.778,43.98
KEY0: KEY0.2 U1.3 | length 123.4
  Top Layer w0.2: 112.269,46.712 120.04,54.483 v1(120.04,56.921)
  Top Layer w0.254: KEY0.2@31.013,29.464 KEY0.2@31.013,35.964 32.387,37.338 v1(40.64,37.338) ; U1.3@110.823,48.312 110.823,47.256 111.395,46.685 112.251,46.685 112.274,46.707
  GND w0.254: v1(40.64,37.338) 63.881,60.579 116.383,60.579 v1(120.04,56.921)
KEY1: Designator205.5 KEY1.2 U1.2 | length 127.8
  Top Layer w0.2: U1.2@111.323,48.312 111.323,47.36 111.572,47.112 112.074,47.112 112.25,47.287 112.25,48.166 v1(115.926,51.841)
  Top Layer w0.3: v1(39.37,19.558) 39.37,26.111 KEY1.2@42.723,29.464 KEY1.2@42.723,35.964
  GND w0.254: KEY1.2@42.723,35.964 42.723,37.236 65.557,60.071 108.89,60.071 115.926,53.035 v1(115.926,51.841)
  Bottom Layer w0.3: v1(39.37,19.558) 39.37,15.494 44.679,10.185 Designator205.5@44.679,7.95
KEY2: Designator205.8 KEY2.2 U1.1 | length 170.6
  Top Layer w0.2: U1.1@111.823,48.312 111.823,48.602 114.229,51.008 114.229,61.392
  Top Layer w0.254: v1(110.842,61.976) 113.644,61.976 114.229,61.392
  Top Layer w0.3: KEY2.2@19.304,29.464 KEY2.2@19.304,35.964
  GND w0.254: KEY2.2@19.304,35.964 19.304,45.466 36.449,62.611 39.243,62.611 40.506,63.874 106.659,63.874 108.556,61.976 v1(110.842,61.976)
  Bottom Layer w0.3: KEY2.2@19.304,29.464 18.034,28.194 18.034,14.986 22.606,10.414 34.595,10.414 Designator205.8@37.059,7.95
KEY3: KEY3.2 U1.4 | length 97.7
  Top Layer w0.254: KEY3.2@31.013,16.764 KEY3.2@31.013,23.264 ; v1(96.799,43.637) 107.544,43.637 110.323,46.416 U1.4@110.323,48.312
  GND w0.254: v1(81.839,42.367) 82.213,42.741 88.32,42.741 88.788,42.273 92.13,42.273 93.03,43.173 95.627,43.173 96.091,43.637 v1(96.799,43.637)
  Bottom Layer w0.254: KEY3.2@31.013,23.264 35.435,27.686 48.254,27.686 62.506,41.939 72.369,41.939 72.798,42.367 v1(81.839,42.367)
KEY4: KEY4.2 U1.5 | length 90
  Top Layer w0.254: KEY4.2@31.013,42.164 KEY4.2@31.013,48.664 ; v1(95.707,44.069) 96.527,44.889 105.852,44.889 107.369,46.406 109.118,46.406 109.823,47.11 U1.5@109.823,48.312
  GND w0.254: v1(77.851,45.923) 80.079,43.695 94.956,43.695 95.329,44.069 v1(95.707,44.069)
  Bottom Layer w0.254: KEY4.2@31.013,48.664 32.97,46.707 72.369,46.707 73.153,45.923 v1(77.851,45.923)
l1: 
l2: 
"LCD BL": Designator141.23 U1.46 | length 26.2
  Top Layer w0.2: v1(86.208,42.164) 89.662,42.164 90.514,41.312 U1.46@91.823,41.312
  Bottom Layer w0.2: Designator141.23@71.907,27.813 85.42,41.326 85.42,41.377 v1(86.208,42.164)
LED0: U1.135
LED1: 
LRCK: 
MCLK: 
MIC_BIAS: C13_1.1 P1.3 U1_1.12 | length 16.7
  Top Layer w0.254: U1_1.12@163.716,28.852 165.885,28.852 167.462,30.429 ; v2(166.98,31.877) 166.98,30.912 167.462,30.429 ; C13_1.1@168.529,30.429 167.462,30.429 ; v2(172.415,31.877) 173.939,31.877 175.235,33.172 P1.3@175.235,34.011
  Bottom Layer w0.254: v2(166.98,31.877) v2(172.415,31.877)
MIC_N: P1.1 U1_1.13 | length 18.9
  Top Layer w0.254: U1_1.13@163.716,29.352 165.039,29.352 v2(165.329,29.642) ; v2(173.203,39.091) P1.1@175.235,39.091
  Bottom Layer w0.254: v2(165.329,29.642) 165.329,35.331 169.088,39.091 v2(173.203,39.091)
MIC_P: P1.2 U1_1.15 | length 16.2
  Top Layer w0.254: U1_1.15@163.716,30.352 165.861,30.352 v2(166.065,30.556) ; v2(173.025,36.551) P1.2@175.235,36.551
  Bottom Layer w0.254: v2(166.065,30.556) 166.065,34.138 168.478,36.551 v2(173.025,36.551)
"MP3 LEFT": 
"MP3 RIGHT": 
NetANT1_1: 
NetBAT_1: 
NetBEEP1_2: 
NetBOOT1_3: 
NetBOOT1_4: 
NetC3_2: C3.2 U1.8 Y1.2 | length 5
  Top Layer w0.2: U1.8@108.323,48.312 108.323,49.263 109.957,50.897 Y1.2@109.957,51.029 C3.2@111.568,51.029
NetC4_2: C4.2 U1.9 Y1.1 | length 9.5
  Top Layer w0.2: U1.9@107.823,48.312 107.823,49.329 108.534,50.04 Y1.1@108.534,51.029 108.534,53.173 C4.2@111.584,56.223
NetC7_2: C7.2 R2.1 U1.24 Y2.1 | length 11.8
  Top Layer w0.2: R2.1@96.622,55.778 96.622,55.002 C7.2@95.771,54.151 99.265,54.151 Y2.1@100.152,53.264 100.323,53.093 U1.24@100.323,48.312
NetC8_2: C8.2 R2.2 U1.23 Y2.2 | length 16.1
  Top Layer w0.2: C8.2@95.777,58.647 96.623,57.801 R2.2@96.623,57.163 97.604,58.144 Y2.2@100.152,58.144 101.087,57.209 101.087,52.877 100.823,52.612 U1.23@100.823,48.312
NetC11_2: C11_1.2 U1_1.8 | length 10.4
  Top Layer w0.254: U1_1.8@163.716,26.852 164.952,26.852 165.329,27.229 166.827,27.229 167.462,26.594 172.858,26.594 C11_1.2@173.43,27.165
NetC14_1: C14_1.1 U1_1.11 | length 4.9
  Top Layer w0.254: U1_1.11@163.716,28.352 165.882,28.352 166.446,27.788 C14_1.1@168.402,27.788
NetC22_1: C22.1 U3.1 | length 2.2
  Top Layer w0.2: U3.1@20.574,56.032 21.412,56.871 C22.1@21.412,57.887
NetC22_2: C22.2 D3.2 L1.2 U3.6 | length 15.3
  Top Layer w0.2: U3.6@23.114,56.032 23.114,57.567 C22.2@22.796,57.885 26.651,57.885 28.402,56.134 32.36,56.134 L1.2@34.468,58.242
NetC30_2: C30.2 C31.2 R15.1 R23.1 U3.5 | length 14.3
  Top Layer w0.2: C30.2@17.183,52.932 17.245,52.932 18.496,51.681 19.506,51.681 20.276,52.451 R15.1@20.955,52.451 22.179,53.675 22.179,54.511 22.355,54.686 22.718,54.686 U3.5@23.114,55.082
  Top Layer w0.3: C30.2@17.183,52.932 C31.2@17.183,54.507
  Top Layer w0.305: R23.1@16.096,58.42 16.096,55.594 C31.2@17.183,54.507
NetC32_1: C32_1.1 U2_1.2 U2_1.3 | length 3.3
  Top Layer w0.254: U2_1.3@145.44,44.958 U2_1.2@146.71,44.958 C32_1.1@146.71,47.015
NetC33_1: C33.1 R31.1 U2_1.4 | length 6.8
  Top Layer w0.254: R31.1@142.3,43.144 142.3,44.307 ; C33.1@143.485,47.066 143.078,47.066 142.3,46.288 142.3,44.307 ; U2_1.4@144.17,44.958 142.951,44.958 142.3,44.307
NetC37_2: C37.2 U5.4 | length 2.4
  Top Layer w0.5: U5.4@57.937,38.236 C37.2@57.937,40.654
NetC38_2: C38.2 U5.7 Y3.1 | length 12.7
  Top Layer w0.3: U5.7@54.127,38.236 54.127,39.319 Y3.1@59.207,44.399 56.844,46.763 C38.2@56.844,47.841
NetC39_2: C39.2 U5.8 Y3.2 | length 10.3
  Top Layer w0.3: U5.8@52.857,38.236 52.857,42.929 Y3.2@54.327,44.399 C39.2@54.327,47.966
NetC46_1: 
NetC49_1: 
NetC49_2: 
NetC50_1: 
NetC50_2: 
NetC55_2: 
NetC57_1: 
NetC58_1: 
NetC66_2: 
NetC67_2: 
NetC68_2: 
NetC69_2: 
NetC70_1: 
NetC70_2: 
NetC74_2: 
NetC75_2: 
NetC76_2: 
NetC77_1: 
NetC77_2: 
NetC78_1: 
NetC78_2: 
NetC79_1: 
NetC80_1: 
NetC81_1: 
NetC82_1: 
NetC91_2: 
NetCAN1_1: 
NetCAN1_3: 
NetD1_1: D1_1.1 RX1.2 | length 2.9
  Top Layer w0.254: RX1.2@141.4,31.28 141.4,29.565 D1_1.1@142.24,28.725
NetD1_2: D1.2 U1.6 | length 7.6
  Top Layer w0.2: U1.6@109.323,48.312 109.323,49.263 109.572,49.512 111.237,49.512 113.182,51.457 113.132,51.508 D1.2@113.132,53.289
NetD4_1: 1.10 2.10@32.512,90.449 3.10@46.558,90.348 4.10@60.63,90.322 5.10@74.6,90.399 6.10@88.595,90.424 7.10@102.692,90.348 8.10@116.713,90.399 9.10@130.81,90.373 10.10@144.755,90.424 11.10@158.826,90.424 12.10@172.847,90.399 13.10@186.893,90.424 14.10@200.889,90.322 15.10@214.935,90.322 DC_IN.1 Designator95.1 Designator95.2 Designator174.1 Designator174.2 Designator174.3 K1.5 R23.2 | length 366.1
  Top Layer w1.5: v1(10.33,62.738) 10.33,61.722 13.631,58.422 R23.2@14.712,58.422 ; DC_IN.1@14.117,99.06 14.732,99.06 Designator174.1@20.32,104.648 Designator174.2@20.32,107.188 Designator174.3@20.32,109.728 ; v1(18.44,87.757) 1.10@18.44,90.475 ; v1@32.512,87.884 2.10@32.512,90.449 ; v1@46.558,87.757 3.10@46.558,90.348 ; v1@60.63,87.757 4.10@60.63,90.322 ; v1@74.6,87.859 5.10@74.6,90.399 ; v1@88.595,87.757 6.10@88.595,90.424 ; v1@102.692,87.757 7.10@102.692,90.348 ; v1@116.713,87.757 8.10@116.713,90.399 ; v1@130.81,87.782 9.10@130.81,90.373 ; v1@144.755,87.782 10.10@144.755,90.424 ; v1@158.826,87.732 11.10@158.826,90.424 ; v1@173.025,87.782 12.10@173.025,90.399 ; v1@186.893,87.782 13.10@186.893,90.424 ; v1@200.889,87.782 14.10@200.889,90.322 ; v1(214.935,87.782) 15.10@214.935,90.322
  VCC w1.5: v1(1.44,61.976) 1.44,78.74 7.282,84.582 ; Designator95.1@1.694,90.932 Designator95.2@1.694,88.392 3.472,88.392 7.282,84.582 ; DC_IN.1@14.625,98.298 16.426,98.298 18.44,96.284 v1(18.44,87.757) ; v1@32.48,87.757 v1(18.44,87.757) ; v1@32.563,87.839 88.411,87.839 v1(88.494,87.757) 144.602,87.757 144.628,87.782 v1(144.856,87.782) v1(172.898,87.782) v1(186.868,87.782) v1(200.863,87.782) v1(214.935,87.782) 207.264,80.112 207.264,75.692 202.356,70.784 202.356,64.241 203.605,62.992 210.82,62.992 211.277,62.535 K1.5@211.277,60.366 ; 7.282,84.582 14.778,84.582 17.953,87.757 v1(18.44,87.757)
  Bottom Layer w1.5: v1(1.44,61.976) 2.202,62.738 v1(10.33,62.738)
  other v1: 32.563,87.681 158.852,87.732 46.533,87.757 60.579,87.757 102.591,87.757 116.548,87.757 130.759,87.782 74.498,87.859 18.313,88.265 32.512,88.29
NetD7_2: D7.2 Q2.3 R20.2 | length 8
  Top Layer w0.2: D7.2@50.927,29.159 51.562,28.524 Q2.3@55.455,28.524 54.129,27.198 R20.2@54.129,25.845
NetDS1_1: 
NetDS2_1: 
NetEJ_2: 
NetEJ_4: 
NetF1_2: F1.2 K1.2 | length 193.1
  Top Layer w0.2: F1.2@24.435,60.554 v1(27.229,60.554)
  Top Layer w0.254: v1(116.51,56.718) 119.024,56.718 119.463,57.157 119.463,57.16 119.801,57.498 119.805,57.498 v1(120.472,58.166)
  VCC w0.254: v1(105.613,59.411) 108.306,56.718 v1(116.51,56.718) ; v1(120.472,58.166) 125.628,53.01 209.321,53.01 K1.2@211.277,54.966
  GND w0.254: v1(75.743,57.988) 76.657,58.903 98.882,58.903 99.39,59.411 v1(105.613,59.411)
  Bottom Layer w0.2: v1(27.229,60.554) 47.177,60.554 49.404,58.327 75.378,58.327 v1@75.717,57.988 ; v1@75.73,57.975 v1@75.743,57.963
NetLED2: 
NetP5_5: 
NetP5_6: 
NetQ1_2: Q1.2 Q2.1 R18.2 | length 9.6
  Top Layer w0.2: Q2.1@53.105,27.574 53.448,27.231 53.448,25.339 53.624,25.164 54.81,25.164 56.682,27.036 Q1.2@57.016,27.036 57.823,27.843 R18.2@57.823,29.516
NetQ1_3: Q1.3 R17.1 | length 1.4
  Top Layer w0.2: Q1.3@59.366,26.086 60.554,26.086 R17.1@60.706,26.238
NetQ2_2: Q2.2 R19.2 | length 2.5
  Top Layer w0.3: Q2.2@53.105,29.474 53.768,29.474 R19.2@55.08,30.786
NetQ3_2: 
NetR1_2: R1_1.2 U1_1.3 | length 3.2
  Top Layer w0.254: U1_1.3@163.716,24.352 165.144,24.352 166.154,25.362 R1_1.2@166.154,25.656
NetR1_2_1: 
NetR4_1: 
NetR4_1_1: 
NetR14_1: R14.1 R16.2 U3.3 | length 3.3
  Top Layer w0.2: R16.2@18.999,52.364 R14.1@18.999,54.127 U3.3@20.569,54.127
NetR15_2: R15.2 U3.4 | length 2
  Top Layer w0.2: R15.2@22.339,52.449 23.114,53.224 U3.4@23.114,54.132
NetR18_1: R18.1 U5.14 | length 3.5
  Top Layer w0.254: R18.1@59.207,29.515 U5.14@59.207,33.036
NetR19_1: R19.1 U5.13 | length 2.9
  Top Layer w0.2: R19.1@56.464,30.785 57.937,32.258 U5.13@57.937,33.036
NetR26_1: 
NetR30_1: 
NetR31_1: 
NetR37_1: 
NetR42_1: 
NetR47_2: 
NetR55_1: 
NetR58_1: 
NetU1_53: U1_1.53 U1_1.54 | length 0.5
  Top Layer w0.254: U1_1.53@156.416,21.552 U1_1.54@156.916,21.552
NetU11_11: 
"NRF CE": U1.91
"NRF CS": U1.92
"NRF IRQ": U1.93
OUTL: 
OUTR: 
"OV SCL": U1.117
"OV SDA": 
"OV VSYNC": U1.100
PA0: U1.34
PA1: U1.35
PA2: Designator135.1 U1.36 | length 12.4
  Top Layer w0.254: Designator135.1@83.058,51.054 85.8,48.312 U1.36@94.323,48.312